# EAGLE board DMB-4770-4-Analog_4-DAC (EAGLE 6.5.0)
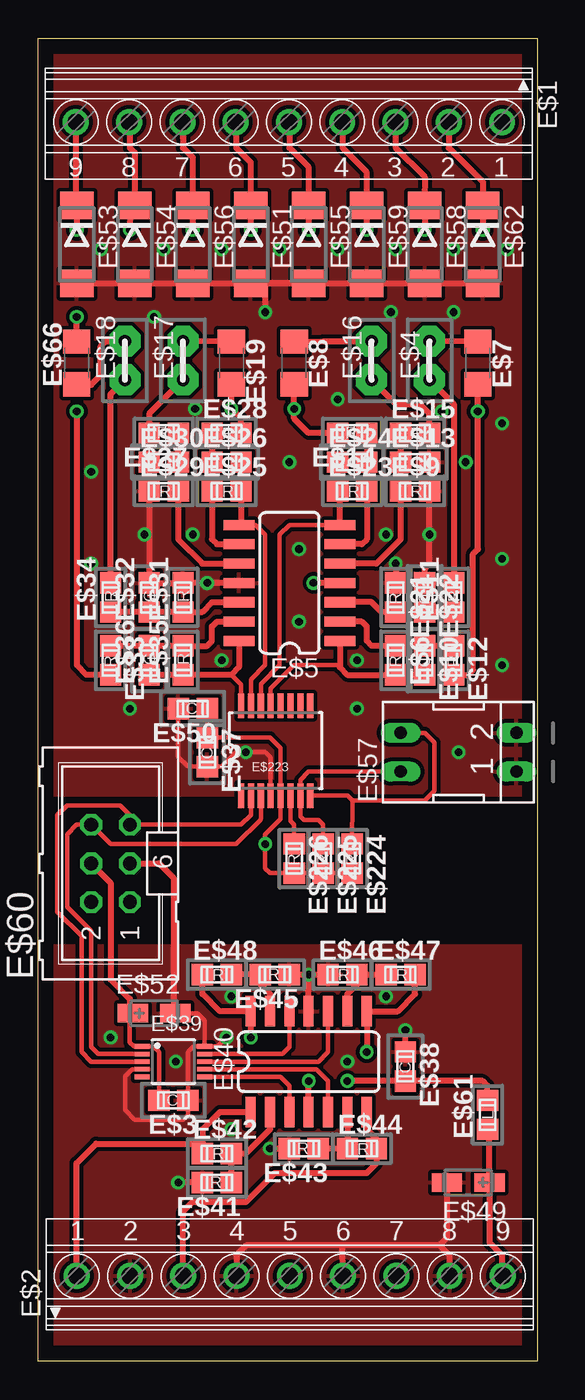
[diagram p0: board, top side]
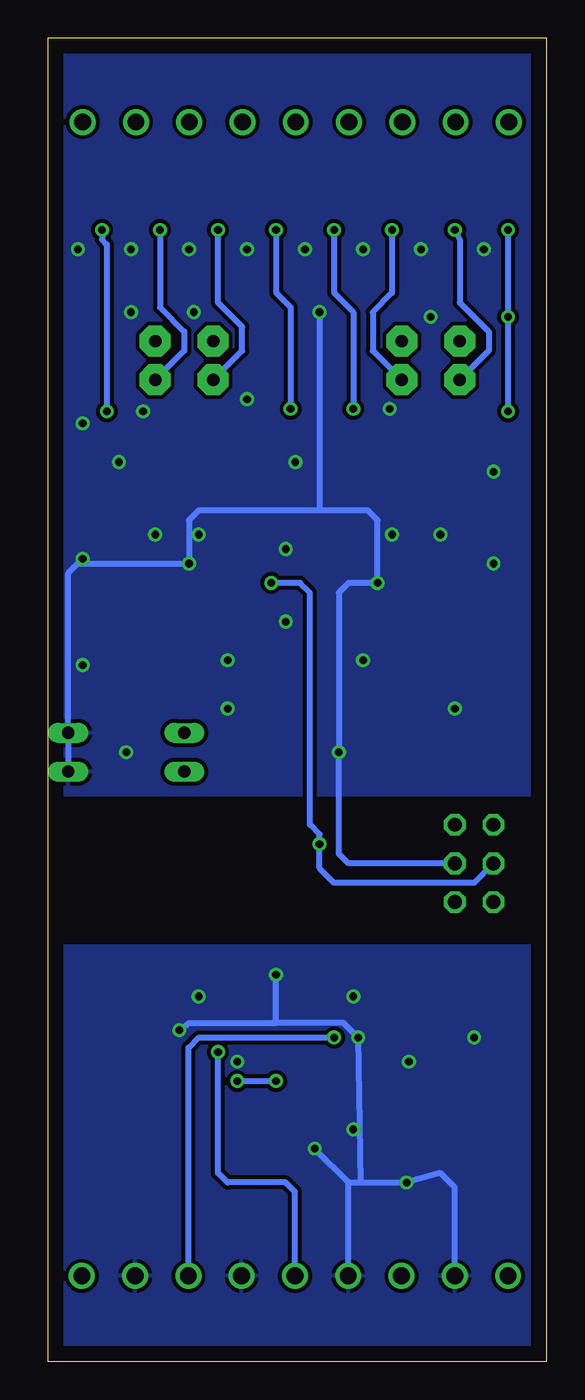
[diagram p1: board, bottom side, seen from below]

Size 32.79 x 86.89 mm. Coordinates in mm from the lower left corner, seen from the top.
Outline: 0,86.89 32.79,86.89 32.79,0 0,0 0,86.89
Copper layers (1*16): Top 0.035mm / dielectric 1.5mm / Bottom 0.035mm
Design rules "default *": minimum track width 10mil, minimum drill 24mil, track to track 7mil, track to pad 7mil, pad to pad 7mil, via to via 7mil, smd to smd 7mil, copper to edge 40mil, drill to drill 8mil, minimum pad ring 10mil, minimum via ring 8mil, stop-mask expansion 4mil, vias tented up to drill 0mil, thermal gap 10mil

## Footprints (pad centres in the part's own frame; a part is rotated, then mirrored left to right if it is on the bottom)
1751316 = drill 1.1 pad 1.7: 1 -13.973,-0.1; 2 -10.473,-0.1; 3 -6.973,-0.1; 4 -3.473,-0.1; 5 0.028,-0.1; 6 3.527,-0.1; 7 7.027,-0.1; 8 10.527,-0.1; 9 14.027,-0.1
C0805 = smd 1.397 x 1.397: 1 -0.953,0; 2 0.953,0
J01N = drill 0.813 pad 2.032 octagon: 1 -1.27,0; 2 1.27,0
SOIC-14 = smd 0.66 x 2.032: 1 -4.445,-3.315; 2 -3.175,-3.315; 3 -1.905,-3.315; 4 -0.635,-3.315; 5 0.635,-3.315; 6 1.905,-3.315; 7 3.175,-3.315; 8 3.175,3.315; 9 1.905,3.315; 10 0.635,3.315; 11 -0.635,3.315; 12 -1.905,3.315; 13 -3.175,3.315; 14 -4.445,3.315
R0805 = smd 1.397 x 1.397: 1 -0.953,0; 2 0.953,0
1206 = smd 1.6 x 1.8: 1 -1.4,0; 2 1.4,0
MSOP10 = smd 0.3 x 1: 1 -1,-2.05; 2 -0.5,-2.05; 3 0,-2.05; 4 0.5,-2.05; 5 1,-2.05; 6 1,2.05; 7 0.5,2.05; 8 0,2.05; 9 -0.5,2.05; 10 -1,2.05
CT3216 = smd 2 x 1.2: + -1.4,0; - 1.4,0
DO214AA = smd 1.8 x 2.2: A 2.55,0; C -2.55,0
EPG-02 = drill 0.813 long: 1 -1.27,-3.81; 2 1.27,-3.81; 3 1.27,3.81; 4 -1.27,3.81
ML6 = drill 0.914 octagon: 1 -2.54,-1.27; 2 -2.54,1.27; 3 0,-1.27; 4 0,1.27; 5 2.54,-1.27; 6 2.54,1.27
L0805 = smd 1.397 x 1.397: 1 -0.953,0; 2 0.953,0
TSSOP16 = smd 0.4 x 1.6: 1 -2.225,-2.85; 2 -1.575,-2.85; 3 -0.925,-2.85; 4 -0.275,-2.85; 5 0.375,-2.85; 6 1.025,-2.85; 7 1.675,-2.85; 8 2.325,-2.85; 9 2.325,3.05; 10 1.675,3.05; 11 1.025,3.05; 12 0.375,3.05; 13 -0.275,3.05; 14 -0.925,3.05; 15 -1.575,3.05; 16 -2.225,3.05

## Placement (x,y rotation side)
E$1  [1751316]  16.51,81.28 180 top
E$2  [1751316]  16.51,5.71 0 top
E$3  100n  [C0805]  8.89,17.14 180 top
E$4  [J01N]  25.72,65.72 90 top
E$5  LMV344  [SOIC-14]  16.51,51.75 90 top
E$6  25.5K  [R0805]  23.5,46.04 270 top
E$7  500  [1206]  28.89,65.56 270 top
E$8  500  [1206]  16.83,65.56 270 top
E$9  25.5K  [R0805]  24.77,57.15 0 top
E$10  100n  [C0805]  25.4,46.04 270 top
E$11  102K  [R0805]  27.3,50.16 90 top
E$12  102K  [R0805]  27.3,46.04 270 top
E$13  100n  [C0805]  24.77,59.05 0 top
E$14  102K  [R0805]  20.64,60.96 180 top
E$15  102K  [R0805]  24.77,60.96 0 top
E$16  [J01N]  21.91,65.72 90 top
E$17  [J01N]  9.53,65.72 90 top
E$18  [J01N]  5.71,65.72 90 top
E$19  500  [1206]  12.7,65.56 270 top
E$21  25.5K  [R0805]  23.5,50.16 270 top
E$22  100n  [C0805]  25.4,50.16 270 top
E$23  25.5K  [R0805]  20.64,57.15 0 top
E$24  100n  [C0805]  20.64,59.05 0 top
E$25  25.5K  [R0805]  12.38,57.15 0 top
E$26  100n  [C0805]  12.38,59.05 0 top
E$27  102K  [R0805]  8.26,60.96 180 top
E$28  102K  [R0805]  12.38,60.96 0 top
E$29  25.5K  [R0805]  8.26,57.15 0 top
E$30  100n  [C0805]  8.26,59.05 0 top
E$31  25.5K  [R0805]  9.53,50.16 90 top
E$32  100n  [C0805]  7.3,50.16 90 top
E$33  102K  [R0805]  4.76,46.04 270 top
E$34  102K  [R0805]  4.76,50.16 90 top
E$35  25.5K  [R0805]  9.53,46.04 90 top
E$36  100n  [C0805]  7.3,46.04 90 top
E$37  100n  [C0805]  11.11,40.01 270 top
E$38  100n  [C0805]  24.13,19.37 270 top
E$39  MCP4728  [MSOP10]  8.89,19.68 270 top
E$40  OPA4171  [SOIC-14]  18.41,19.68 0 top
E$41  82.5K  [R0805]  11.75,11.75 180 top
E$42  330K  [R0805]  11.75,13.65 0 top
E$43  82.5K  [R0805]  17.46,13.97 180 top
E$44  330K  [R0805]  21.27,13.97 0 top
E$45  82.5K  [R0805]  15.56,25.4 180 top
E$46  82.5K  [R0805]  20,25.4 0 top
E$47  330K  [R0805]  23.81,25.4 0 top
E$48  330K  [R0805]  11.75,25.4 0 top
E$49  10u  [CT3216]  28.26,11.75 180 top
E$50  1u  [C0805]  10.16,42.86 180 top
E$51  1SMB30AT3G  [DO214AA]  13.97,73.34 270 top
E$52  10u  [CT3216]  7.62,22.86 0 top
E$53  1SMB30AT3G  [DO214AA]  2.54,73.34 270 top
E$54  [DO214AA]  6.35,73.34 270 top
E$55  1SMB30AT3G  [DO214AA]  17.78,73.34 270 top
E$56  1SMB30AT3G  [DO214AA]  10.16,73.34 270 top
E$57  [EPG-02]  27.62,40.01 90 top
E$58  1SMB30AT3G  [DO214AA]  25.4,73.34 270 top
E$59  1SMB30AT3G  [DO214AA]  21.59,73.34 270 top
E$60  [ML6]  4.76,32.7 90 top
E$61  10uH  [L0805]  29.53,16.19 90 top
E$62  1SMB30AT3G  [DO214AA]  29.21,73.34 270 top
E$66  500  [1206]  2.54,65.56 90 top
E$223  ADC128D818  [TSSOP16]  15.56,40.01 0 top
E$224  10K  [R0805]  20.64,33.02 270 top
E$225  10K  [R0805]  18.73,33.02 270 top
E$226  10K  [R0805]  16.83,33.02 270 top

## Library data of the parts
E$1 E$2 = con-phoenix-350
E$3 E$6 E$9-E$15 E$21-E$38 E$41-E$48 E$50 E$61 E$224-E$226 = divers
E$4 E$16-E$18 = connectors
E$5 E$40 E$223 = SparkFun-AnalogIC
E$7 E$8 E$19 E$66 = SparkFun-Resistors
E$39 = SparkFun-DigitalIC
E$49 E$51-E$56 E$58 E$59 E$62 = ref-packages
E$57 = special
E$60 = con-harting-ml

## Nets
3V3: E$3.2 E$5.4 E$37.1 E$39.1 E$50.1 E$52.+ E$60.4 E$223.5 E$224.2 E$225.2 E$226.2
GND: E$2.2 E$2.4 E$2.6 E$2.8 E$3.1 E$5.11 E$9.2 E$13.2 E$21.1 E$22.1 E$29.1 E$30.1 E$31.2 E$32.2 E$37.2 E$38.1 E$39.4 E$39.10 E$40.11 E$41.2 E$43.2 E$45.1 E$46.1 E$49.- E$50.2 E$51.A E$52.- E$53.A E$54.A E$55.A E$56.A E$57.1 E$57.2 E$58.A E$59.A E$60.3 E$62.A E$223.4
IN1+: E$1.8 E$18.1 E$34.2 E$54.C
IN1-: E$1.9 E$33.2 E$53.C E$66.2
IN2+: E$1.7 E$17.1 E$27.2 E$56.C
IN2-: E$1.6 E$19.2 E$28.2 E$51.C
IN3+: E$1.4 E$15.2 E$16.1 E$59.C
IN3-: E$1.5 E$8.2 E$14.2 E$55.C
IN4+: E$1.3 E$4.1 E$11.2 E$58.C
IN4-: E$1.2 E$7.2 E$12.2 E$62.C
S$8: E$39.3 E$60.5 E$223.2
S$9: E$2.9 E$49.+ E$61.1
S$10: E$4.2 E$7.1
S$11: E$40.6 E$43.1 E$44.1
S$13: E$5.2 E$6.1 E$10.1 E$12.1
S$14: E$5.6 E$14.1 E$23.2 E$24.2
S$15: E$18.2 E$66.1
S$16: E$5.5 E$9.1 E$13.1 E$15.1
S$20: E$17.2 E$19.1
S$21: E$8.1 E$16.2
S$23: E$5.3 E$11.1 E$21.2 E$22.2
S$25: E$5.9 E$25.1 E$26.1 E$28.1
S$28: E$5.12 E$31.1 E$32.1 E$34.1
S$29: E$5.10 E$27.1 E$29.2 E$30.2
S$31: E$39.6 E$40.3
S$32: E$39.7 E$40.5
S$33: E$39.9 E$40.12
S$34: E$39.8 E$40.10
S$35: E$40.2 E$41.1 E$42.2
S$38: E$2.1 E$40.1 E$42.1
S$39: E$2.3 E$40.7 E$44.2
S$40: E$40.13 E$45.2 E$48.2
S$41: E$40.9 E$46.2 E$47.1
S$42: E$2.7 E$40.14 E$48.1
S$47: E$5.8 E$25.2 E$26.2 E$223.15
S$48: E$5.7 E$23.1 E$24.1 E$223.14
S$49: E$5.14 E$35.1 E$36.1 E$223.16
S$50: E$5.1 E$6.2 E$10.2 E$223.13
S$55: E$5.13 E$33.1 E$35.2 E$36.2
S$59: E$2.5 E$40.8 E$47.2
S$231: E$223.6 E$226.1
S$235: E$57.4 E$223.7 E$225.1
S$236: E$57.3 E$223.8 E$224.1
SCL: E$39.2 E$60.6 E$223.3
VCC: E$38.2 E$40.4 E$61.2

## Tracks (layer width: path | path; a pad name or v marks a point on that pad's centre or on a via)
3V3  (via drill 0.5)
  Top 0.305: E$50.1 E$37.1 15.24,40.96 15.93,40.27 E$223.5 15.93,35.62 14.92,34.61 v14.92,33.97 14.92,32.38 15.24,32.07 E$226.2 E$225.2 E$224.2 | E$52.+ 6.03,22.73 6.03,20.95 6.3,20.68 E$39.1 7.57,20.68 7.94,20.32 E$3.2
  Top 0.406: E$60.4 4.76,31.43 4.76,25.08 6.03,23.81 6.03,23.05 E$52.+ | E$5.4 v18.1,51.12
  Bottom 0.406: E$60.4 4.76,31.43 13.97,31.43 14.92,32.38 v14.92,33.97 14.92,34.61 15.56,35.24 15.56,50.48 16.19,51.12 v18.1,51.12
GND  (via drill 0.5)
  Top 0.305: E$223.4 15.28,39.65 14.92,40.01 v13.65,40.01 13.02,40.01 12.06,39.05 E$37.2 9.84,39.05 9.21,39.69 E$50.2 | E$39.4 6.17,19.18 5.71,18.73 5.71,16.51 6.35,15.88 9.53,15.88 9.84,16.19 E$3.1 9.84,20.32 10.21,20.68 E$39.10 | E$52.- 10.48,22.86 10.94,22.4 E$39.10 | E$39.10 11.79,20.68 v12.38,21.27
  Top 0.406: E$13.2 E$9.2 | E$9.2 | E$9.2 25.72,52.7 25.72,52.39 25.4,52.07 E$22.1 E$21.1 v23.5,52.39 | E$30.1 E$29.1 E$32.2 E$31.2 E$5.11 v11.11,51.12 | E$53.A E$54.A E$56.A E$51.A E$55.A | E$55.A E$59.A E$58.A E$62.A | E$55.A 14.93,70.79 14.92,70.8 v14.92,68.9 | E$60.3 7.94,32.7 8.89,31.75 8.89,22.99 E$52.- | E$49.- 26.86,8.12 26.35,7.62 | E$2.8 27.04,6.93 26.35,7.62 | E$2.6 20.04,5.68 20,7.62 | 26.35,7.62 20,7.62 | E$38.1 24.13,21.27 v24.13,21.75 | E$46.1 18.41,25.4 v17.78,25.4 | E$45.1 16.83,25.4 v17.78,25.4 | 20,7.62 13.67,7.62 13.04,6.99 E$2.4 | E$40.11 v17.78,25.4 | E$43.2 v15.24,13.97 | E$41.2 v9.21,11.75
  Bottom 0.406: 14.92,55.88 11.75,55.88 11.11,55.24 v11.11,51.12 13.02,51.12 13.65,50.48 v13.65,40.01 13.65,33.34 13.02,32.7 E$60.3 | 14.92,55.88 22.86,55.88 23.5,55.24 v23.5,52.39 30.8,52.39 31.43,51.75 E$57.2 E$57.1 | v14.92,68.9 14.92,55.88 | v24.13,21.75 23.5,22.23 17.78,22.23 | 17.78,22.23 v17.78,25.4 | E$2.4 13.04,11.73 13.02,11.75 | v15.24,13.97 13.02,11.75 | 17.78,22.23 13.34,22.23 v12.38,21.27 12.22,11.75 | 13.02,11.75 12.22,11.75 | 12.22,11.75 v9.21,11.75 6.99,12.38 6.04,11.44 E$2.2
  other vias: 10.32,62.55 19.68,63.18 3.49,58.42 3.49,52.39 10.16,54.29 22.86,54.29 17.14,53.34 17.14,48.58 20.95,46.04 12.06,46.04 27.3,68.9 6.03,42.86 20.95,42.86 27.62,40.01 30.48,61.59 30.48,45.72 30.48,52.7 6.99,54.29 16.51,59.05 7.62,68.58 23.18,68.9 23.5,73.03 19.68,73.03 15.88,73.03 12.06,73.03 8.26,73.03 4.13,73.03 27.3,73.03 30.8,73.03 25.72,54.29 4.76,21.27 12.7,23.97 22.86,23.97 20.32,19.68 9.05,19.68 12.7,15.24 28.1,59.05 26.51,62.39
  pour Top (isolate 0.254): 0,37.15 32.7,37.15 32.7,86.68 0,86.68
  pour Bottom (isolate 0.254): 0,37.15 32.7,37.15 32.7,86.68 0,86.68
  pour Top (isolate 0.254): 0,0 32.7,0 32.7,27.3 0,27.3
  pour Bottom (isolate 0.254): 0,0 32.7,0 32.7,27.3 0,27.3
IN1+  (via drill 0.5)
  Top 0.406: E$34.2 4.76,63.5 E$18.1 | E$1.8 5.98,81.33 6.03,81.28 6.03,79.69 6.35,79.38 E$54.C 6.04,75.58 v6.03,74.3
  Bottom 0.406: v6.03,74.3 5.71,73.66 5.71,69.53 3.81,67.63 3.81,66.36 E$18.1
IN1-  (via drill 0.5)
  Top 0.406: v2.54,62.39 2.54,45.72 3.17,45.09 E$33.2 | E$1.9 2.48,75.95 E$53.C 2.55,75.58 v2.54,74.3 | E$66.2 v2.54,68.58
  Bottom 0.406: v2.54,74.3 v2.54,68.58 v2.54,62.39
IN2+  (via drill 0.5)
  Top 0.406: E$1.7 9.48,80.6 9.53,80.33 9.53,79.69 10.16,79.06 E$56.C v10.16,74.3 | E$17.1 7.3,62.23 E$27.2
  Bottom 0.406: v10.16,74.3 10.16,70.17 11.43,68.9 11.43,66.36 E$17.1
IN2-  (via drill 0.5)
  Top 0.406: E$1.6 12.98,80.68 13.02,80.33 13.02,79.69 13.97,78.74 E$51.C v13.97,74.3 | E$28.2 13.34,61.91 v12.7,62.55 E$19.2
  Bottom 0.406: v13.97,74.3 13.97,70.17 12.7,68.9 v12.7,62.55
IN3+  (via drill 0.5)
  Top 0.406: E$15.2 25.72,62.23 25.08,62.87 23.5,62.87 E$16.1 | E$1.4 20,79.69 21.57,78.12 21.57,76.55 E$59.C v21.59,74.3
  Bottom 0.406: E$16.1 20,66.36 20,67.94 21.59,69.53 v21.59,74.3
IN3-  (via drill 0.5)
  Top 0.406: E$14.2 17.78,60.96 16.83,61.91 v16.83,62.55 E$8.2 | E$1.5 16.51,79.69 17.75,78.45 17.75,76.24 E$55.C v17.78,74.3
  Bottom 0.406: v17.78,74.3 17.78,70.17 16.83,69.22 v16.83,62.55
IN4+  (via drill 0.5)
  Top 0.406: E$4.1 27.3,62.87 E$11.2 | E$1.3 23.48,79.7 25.4,77.79 25.39,76.22 E$58.C v25.4,74.3
  Bottom 0.406: v25.4,74.3 25.4,69.22 23.81,67.63 23.81,66.36 E$4.1
IN4-  (via drill 0.5)
  Top 0.406: E$12.2 28.26,45.09 28.57,45.4 28.57,53.02 28.89,53.34 v28.89,62.39 E$7.2 | E$1.2 26.99,79.69 29.2,77.47 E$62.C v29.21,74.3
  Bottom 0.406: v29.21,74.3 29.21,73.66 28.89,73.34 v28.89,62.39
S$8
  Top 0.305: E$223.2 13.98,35.89 13.34,35.24 E$60.5 6.03,35.88 5.4,36.51 1.91,36.51 1.27,35.88 1.27,29.53 2.86,27.94 2.86,20.32 3.49,19.68 E$39.3
S$9
  Top 0.406: E$2.9 30.48,5.67 30.48,6.99 29.66,7.81 E$49.+ 29.66,15.11 E$61.1
S$10
  Top 0.406: E$7.1 E$4.2
S$11
  Top 0.406: E$40.6 E$44.1 E$43.1 | E$43.1
S$13
  Top 0.406: E$12.1 25.72,46.99 E$10.1 E$6.1 21.91,46.99 21.59,47.31 21.59,48.26 21.27,48.58 E$5.2
S$14
  Top 0.406: E$14.1 21.59,60.33 21.59,59.37 E$24.2 | E$24.2 | E$24.2 E$23.2 21.59,53.98 21.27,53.66 E$5.6
S$15
  Top 0.406: E$18.2 4.45,66.99 4.13,66.67 4.13,64.77 3.49,64.14 2.54,64.14 E$66.1
S$16
  Top 0.406: E$15.1 E$13.1 E$9.1 23.81,53.98 22.23,52.39 E$5.5
S$20
  Top 0.406: E$19.1 E$17.2
S$21
  Top 0.406: E$16.2 18.73,66.99 E$8.1
S$23
  Top 0.406: E$11.1 26.04,49.21 E$22.2 E$21.2 22.54,49.21 21.91,49.85 E$5.3
S$25
  Top 0.406: E$28.1 11.43,60.01 E$26.1 E$25.1 11.43,53.98 11.75,53.66 E$5.9
S$28
  Top 0.406: E$5.12 11.43,49.85 10.79,49.21 E$31.1 E$32.1 E$34.1
S$29
  Top 0.406: E$27.1 E$30.2 E$29.2 9.21,53.98 10.79,52.39 E$5.10
S$31
  Top 0.305: E$39.6 15.92,18.68 16.51,18.1 E$40.3
S$32
  Top 0.305: E$39.7 18.28,19.18 19.05,18.41 E$40.5
S$33
  Top 0.305: E$39.9 16.06,20.18 16.51,20.64 E$40.12
S$34
  Top 0.305: E$39.8 18.41,19.68 19.05,20.32 E$40.10
S$35
  Top 0.406: E$40.2 15.24,16.05 15.24,15.24 13.65,13.65 E$42.2 E$41.1
S$38
  Top 0.406: E$40.1 11.93,16.37 10.79,15.24 E$42.1 10.79,14.29 3.81,14.29 2.54,13.02 E$2.1
S$39
  Top 0.406: E$2.3 9.54,9.86 10.16,10.48 13.65,10.48 15.56,12.38 21.59,12.38 22.23,13.02 E$44.2 22.23,14.61 21.59,15.24 E$40.7
S$40
  Top 0.406: E$40.13 15.24,24.13 14.61,24.77 E$45.2 E$48.2
S$41
  Top 0.406: E$40.9 20.32,24.13 20.95,24.77 E$46.2 22.23,25.4 E$47.1
S$42  (via drill 0.5)
  Top 0.406: E$48.1 10.79,24.13 11.93,23 E$40.14 v13.97,21.27
  Bottom 0.406: E$2.7 23.54,20.59 22.86,21.27 v13.97,21.27
S$47
  Top 0.305: E$5.8 14.29,54.93 14.92,54.29 14.92,45.72 13.98,44.78 E$223.15 13.98,43.17 13.97,43.18
  Top 0.406: E$5.8 13.34,54.93 E$25.2 E$26.2
S$48
  Top 0.305: E$5.7 16.51,54.93 15.88,54.29 15.88,45.72 14.63,44.48 E$223.14
  Top 0.406: E$5.7 19.82,56.97 E$23.1 | E$24.1 E$23.1 | E$23.1
S$49
  Top 0.305: E$223.16 13.33,44.45 12.7,45.09
  Top 0.406: E$36.1 E$35.1 12.7,45.09 13.2,45.58 E$5.14
S$50
  Top 0.305: 19.82,45.72 16.83,45.72 15.28,44.17 E$223.13
  Top 0.406: E$10.2 E$6.2 20.32,45.09 19.82,45.58 19.82,45.72 E$5.1
S$55
  Top 0.406: E$5.13 11.75,48.58 11.43,48.26 11.43,47.31 11.11,46.99 E$35.2 E$36.2 E$33.1
S$59  (via drill 0.5)
  Top 0.406: E$47.2 24.77,24.13 23.64,23 E$40.8 v21.59,20.32
  Bottom 0.406: E$2.5 16.54,11.14 17.14,11.75 20.95,11.75 21.59,12.38 v21.59,20.32
S$231
  Top 0.305: E$223.6 16.58,35.49 16.83,35.24 E$226.1
S$235
  Top 0.305: E$225.1 18.73,35.24 18.41,35.56 17.46,35.56 17.23,35.79 E$223.7 17.23,38.19 17.78,38.73 E$57.4
S$236
  Top 0.305: E$223.8 18.11,37.16 18.41,37.15 20.32,37.15 20.64,36.83 | E$224.1 20.64,34.61 20.64,36.2 20.64,36.83 | E$57.3 25.4,41.27 26.04,40.64 26.04,37.47 25.4,36.83 20.64,36.83
SCL
  Top 0.305: E$223.3 14.63,35.69 14.61,35.56 13.02,33.97 4.76,33.97 E$60.6 2.54,35.24 1.91,34.61 1.91,29.84 3.49,28.26 3.49,20.64 3.94,20.18 E$39.2
VCC  (via drill 0.5)
  Top 0.406: E$40.4 v17.78,18.41 | v20.32,18.41 E$38.2 29.21,18.41 29.53,18.1 E$61.2
  Bottom 0.406: v20.32,18.41 v17.78,18.41